# Altium PCB PCB2_DATCHIKI.PcbDoc
Units mm, origin at the board's own origin, x right, y up, seen from the top; angles counter-clockwise.
Board outline 20 x 20 mm, 2 copper layers (Top Layer, Bottom Layer), stack 1.57 mm thick; 16 components, 36 nets, 53 pads, 14 vias.
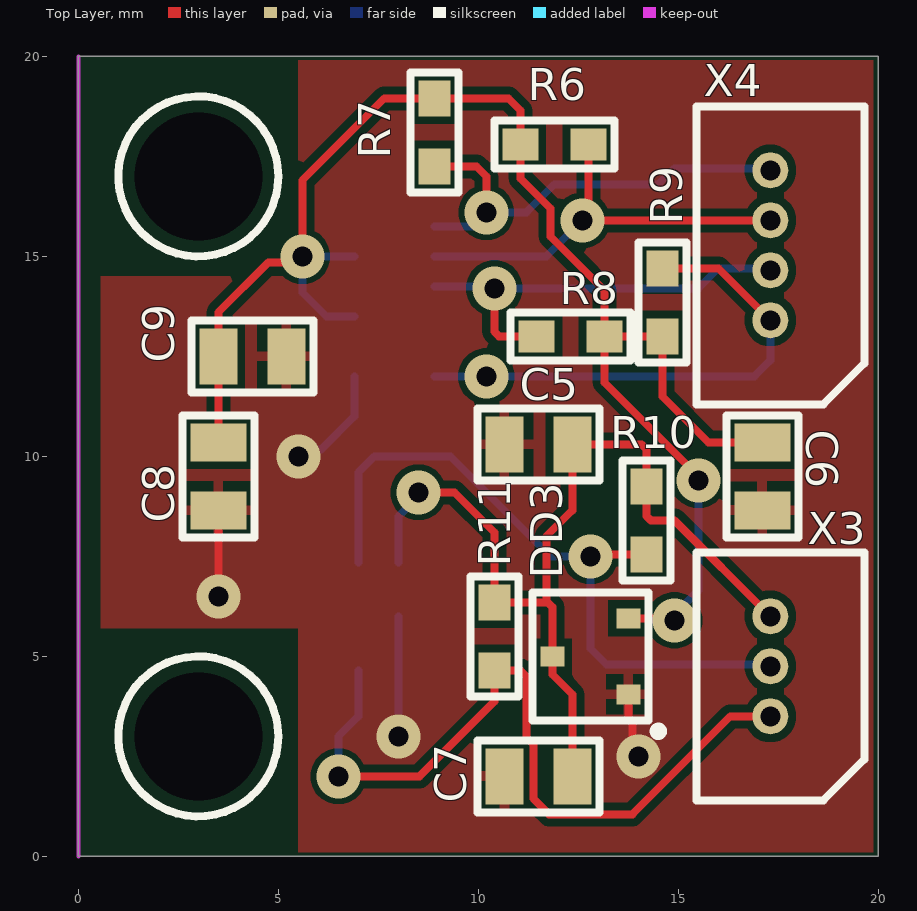
[diagram p0: Top Layer view]
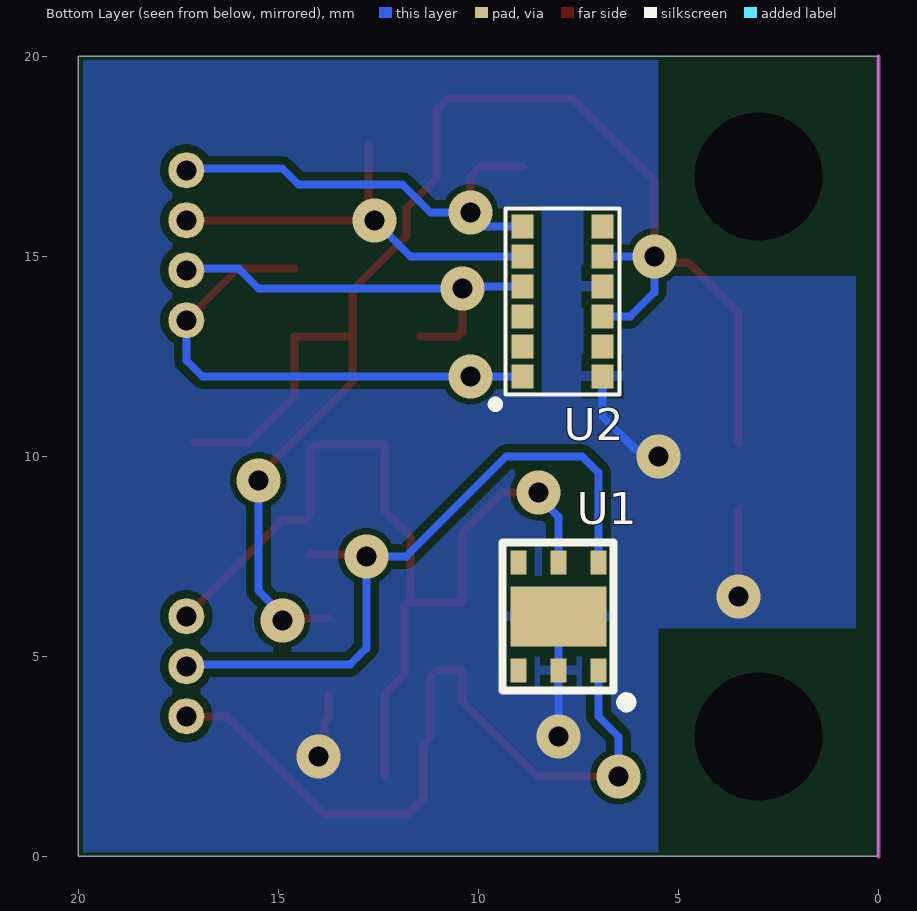
[diagram p1: Bottom Layer view, seen from below]
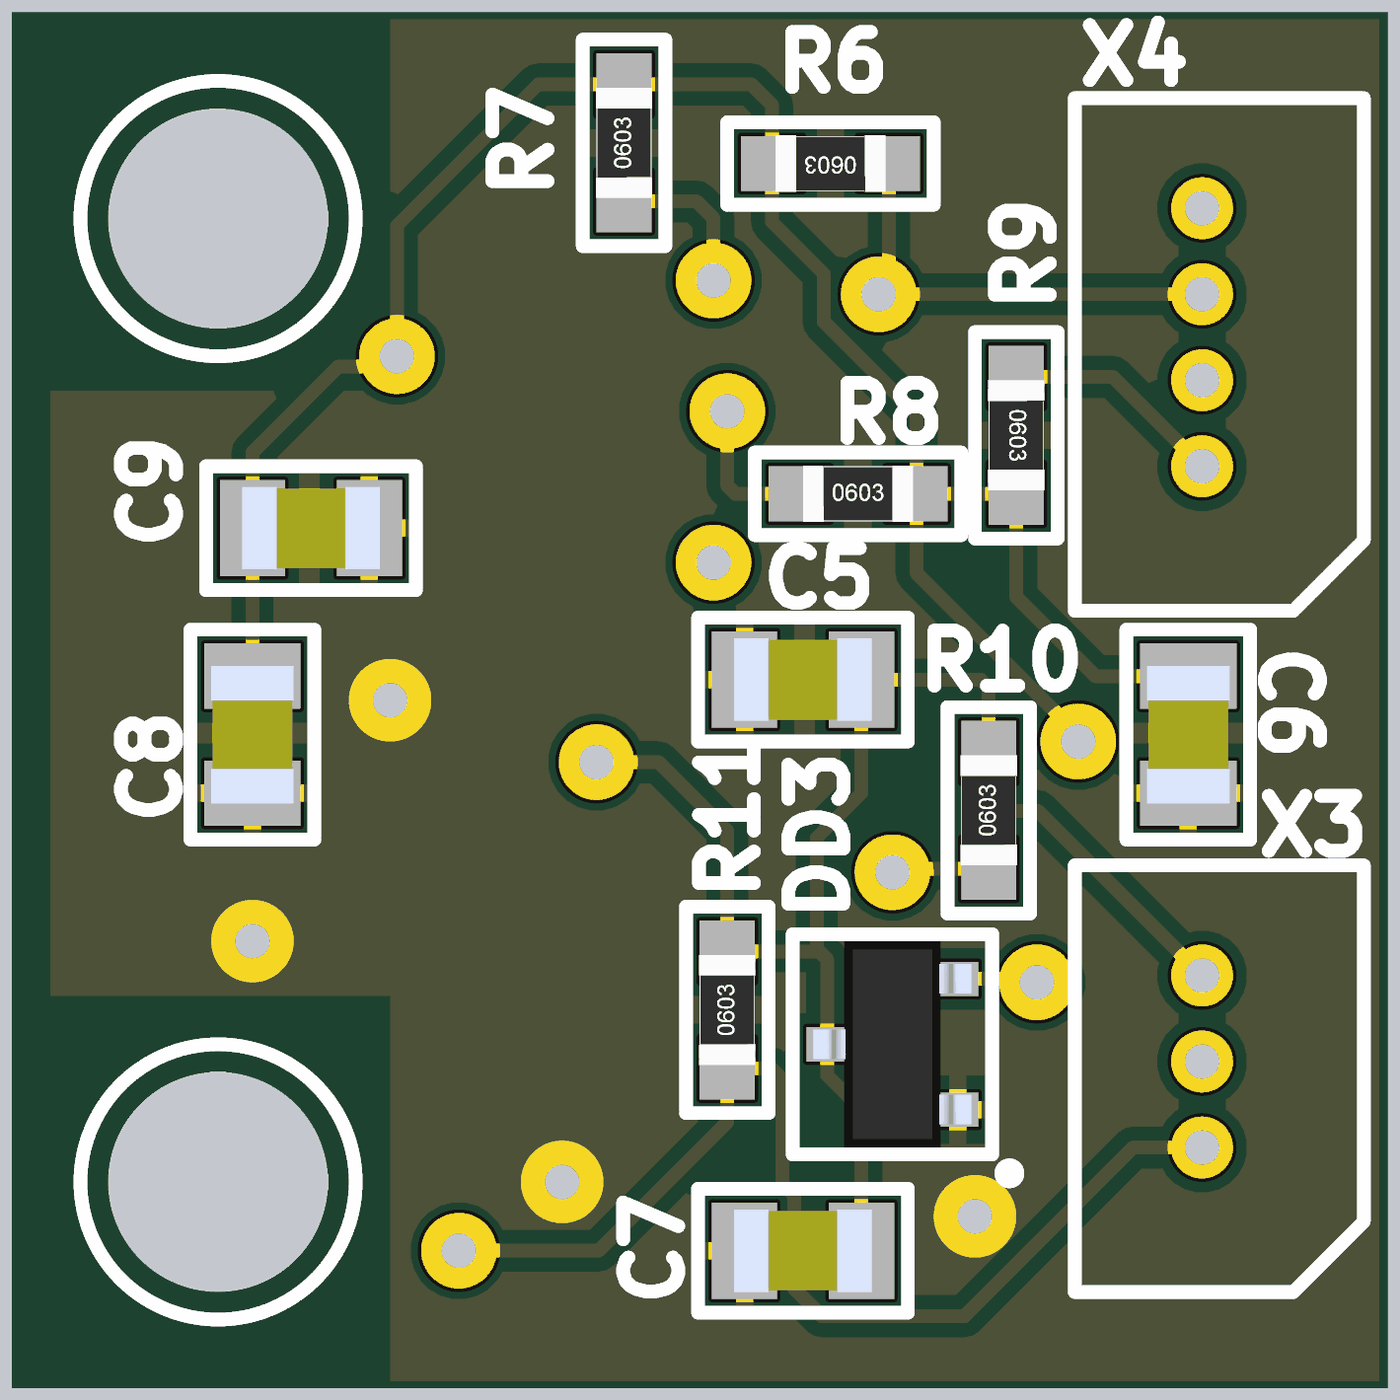
[diagram p2: 3D render of the assembled board from above, using the file's embedded part models]

## Layer stack, top to bottom
Top Solder: solder mask 0.01, Solder Resist, Dk 3.5
Top Layer: signal copper 0.035
Dielectric 1: dielectric 1.5, FR-4, Dk 4.6
Bottom Layer: signal copper 0.035
Bottom Solder: solder mask 0.01, Solder Resist, Dk 3.5

## Board outline
0,0 0,20 20,20 20,0

## Design rules (kind name [scope] priority, off if disabled: settings)
AcuteAngle [All] p1: minimum=6.00000000000000E+0001 checktracksonly=FALSE
Clearance Clearance_KeepOutLayer [OnLayer('Keep-Out Layer')] p1: gap=0.5 ignorepadtopadclearanceinfootprint=FALSE
Clearance [All] p2: gap=0.15 ignorepadtopadclearanceinfootprint=FALSE except(0.2: Track-Fill Track-Poly Track-Region SMDPad-Fill SMDPad-Poly SMDPad-Region THPad-Fill THPad-Poly THPad-Region Fill-Fill Fill-Poly Fill-Region Poly-Poly Poly-Region Region-Region)
ComponentClearance [All] p1: gap=0.2 collisioncheckmode=3 verticalgap=0.2 showdistances=FALSE
HoleSize [All] p1: absolutevalues=TRUE maxlimit=3.2 minlimit=0.3 maxpercent=80.000 minpercent=20.000
HoleToHoleClearance [All] p1: gap=0.2 allowstackedmicrovias=TRUE
MinimumAnnularRing [All] p1: minimumring=0.2
MinimumSolderMaskSliver [All] p1: minsoldermaskwidth=0.15
PolygonConnect PolygonConnect_Via [IsVia] p1: connectstyle=Direct reliefconductorwidth=0.254 reliefentries=4 polygonreliefangle="90 Angle" airgapwidth=0.254
PolygonConnect [All] p2: connectstyle=Relief reliefconductorwidth=0.25 reliefentries=4 polygonreliefangle="90 Angle" airgapwidth=0.25
RoutingVias [All] p1: holewidth=0.4 width=0.9 viastyle="Through Hole" minholewidth=0.3 minwidth=0.7 maxholewidth=0.5 maxwidth=1.1
SMDEntry [All] p1: side=TRUE corner=TRUE anyangle=FALSE
SMDNeckDown [All] p1: percent=100.000
SMDToCorner [All] p1: distance=0
SMDToPlane [All] p1: distance=0
SilkToSilkClearance [All] p1: silktosilkclearance=0
SilkToSolderMaskClearance [IsPad] p1: minsilkscreentomaskgap=0 clearancetoexposedcopper=FALSE
SolderMaskExpansion [All] p1: expansion=0.05 istentingtop=FALSE
Width [All] p1: maxlimit=5 minlimit=0.15 preferedwidth=0.25
24 further rules are at their usual default settings.

## Classes and differential pairs
component class Sheet3_mk: C7 C8 C9 DD3
component class Sheet2_datciki: C5 C7 C8 C9 DD3 R6 R7 R9 R10 U1 X3 X4

## Components (designator, comment, footprint, x,y, rotation, side; value= is the part's Value field where it differs from the comment)
C5 "1 мкФ" CAP_0805 11.5,10.3 r180 top
C6 "1 мкФ" CAP_0805 17.1,9.5 r270 top
C7 "100 нФ" CAP_0805 11.5,2 r0 top
C8 "4.7 мкФ" CAP_0805 3.5,9.5 r270 top
C9 "100 нФ" CAP_0805 4.35,12.5 r0 top
DD3 "XC6206P282MR" SOT-23-3_STAB_POWER 12.8,5 r90 top
R6 "47 кОм" RES_0603 11.9,17.8 r180 top
R7 "47 кОм" RES_0603 8.9,18.1 r90 top
R8 "47 кОм" RES_0603 12.3,13 r0 top
R9 "47 кОм" RES_0603 14.6,13.85 r270 top
R10 "10 кОм" RES_0603 14.2,8.4 r90 top
R11 "10 кОм" RES_0603 10.4,5.5 r90 top
U1 "HPP845E034R5" HTU20D(F) 9,4.65 r90 bottom
U2 "VL6180XV0NR/1" SOP12 6.9,15.75 r270 bottom
X3 "SCT1251WV-3P" Raziem3(1) 17.3,4.75 r90 top
X4 "SCT1251WV-4P" Raziem4(1) 17.3,14.65 r90 top

## Footprints (in the part's own frame and the unit in brackets; to place one, negate y for a bottom-side part, rotate by r counter-clockwise, add the part's x,y. Pads: shape width x height; smd on the part's side, far side on the other; paste and mask are expansions set on the pad)
CAP_0805 [mm]
  rect 0.95x1.4 smd: 1(-0.85,0) 2(0.85,0)
  silkscreen extent -1.53,-0.9 1.53,0.9, body extent -1,-0.6 1,0.6, height 0.9
HTU20D(F) [mm]
  rect 0.6x0.4 smd: 1(0,-2) 2(0,-1) 3(0,0) 4(2.7,0) 5(2.7,-1) 6(2.7,-2)
  rect 1.5x2.4 smd: 2(1.35,-1)
  silkscreen extent -0.92,-2.82 3.2,0.4, body extent -0.25,-2.17 2.95,0.15, height 0.7
Raziem3(1) [mm]
  round 0.9 hole 0.5: 1(-1.25,0) 2(0,0) 3(1.25,0)
  silkscreen extent -3.35,-2.35 2.85,1.85, body extent -2.75,-1.75 2.75,1.75, height 4.7
Raziem4(1) [mm]
  round 0.9 hole 0.5: 1(-1.25,0) 2(0,0) 3(1.25,0) 4(2.5,0)
  silkscreen extent -3.35,-2.35 4.1,1.85, body extent -2.75,-1.75 4,1.75, height 4.7
RES_0603 [mm]
  rect 0.9x0.8 smd: 1(-0.85,0) 2(0.85,0)
  silkscreen extent -1.5,-0.6 1.5,0.6, body extent -0.8,-0.41 0.8,0.41, height 0.45
SOP12 [mm]
  rect 0.6x0.55 smd: 1(3.75,-2) 2(3,-2) 3(2.25,-2) 4(1.5,-2) 5(0.75,-2) 6(0,-2) 7(0,0) 8(0.75,0) 9(1.5,0) 10(2.25,0) 11(3,0) 12(3.75,0)
  silkscreen extent -0.45,-2.77 4.54,0.43, body extent -0.4,-2.37 4.15,0.38, height 1.2
SOT-23-3_STAB_POWER [mm]
  rect 0.5x0.6 smd: 1(-0.95,-0.95) 2(0,0.95) 3(0.95,-0.95)
  silkscreen extent -1.97,-1.79 1.6,1.45, body extent -1.5,-1.15 1.5,1.15, height 1.1

## Part data
C5 C6 C7 C8 C9: library part Condensator
DD3: library part Stability_power, Name=XC6206P282MR
R6 R7 R8 R9 R10 R11: library part Rezistor
U1: library part Datchik_vlaj_temp, Name=HPP845E034R5
U2: library part Datchik_osvet, Name=VL6180XV0NR/1
X3: library part Raziem_3KONTKTA, Name=SCT1251WV-3P
X4: library part Raziem_4KONTKTA, Name=SCT1251WV-4P

## Free pads (board coordinates)
  round 0 hole 3.2 unplated: 1(3,17) 1(3,3)

## Via types
v1: diameter 1.1, hole 0.5, Top Layer to Bottom Layer, 14 vias

## Nets (pads, with @x,y where several pads share a name; then routed paths per layer and width w, separated by ;. In a path a pad name is that pad's centre, name@x,y a point inside that pad or via, vN(x,y) a via of type N, cw(c..) or ccw(c..) an arc to the next point about the centre after c; other vN are vias at no path point)
GND: C5.2 C6.2 C7.1 C8.2 C9.2 DD3.1 U1.2 U2.9 U2.12 | length 9.6
  Top Layer w0.2: v1(3.5,6.5) C8.2 ; DD3.1 13.75,3.45 13.85,3.35 13.85,2.65 v1(14,2.5)
  Bottom Layer w0.2: v1(5.5,10) 5.672,10.172 6.072,10.172 6.9,11 U2.12 ; v1(8,3) 8,4.65 U1.2@8,6
NetC1_1: 
NetC2_1: 
NetC3_2: 
NetC4_1: C5.1 C7.2 DD3.2 R10.2 R11.2 U1.5 X3.3 | length 23.8
  Top Layer w0.2: v1(8.5,9.1) 9.4,9.1 10.4,8.1 R11.2 ; R11.2@10.5,6.35 11.7,6.35 ; C7.2 12.35,4.05 11.85,4.55 11.85,6.233 11.733,6.35 11.7,6.35 ; X3.3 14.907,8.393 14.317,8.393 14.2,8.51 R10.2 14.2,10.183 14.083,10.3 C5.1 12.35,8.65 11.7,8 11.7,6.35
  Bottom Layer w0.2: U1.5 8,8.498 8.6,9.098 v1@8.6,9.1
NetC6_1: C6.1 C8.1 C9.1 DD3.3 R6.2 R7.2 R8.2 R9.2 U2.8 U2.10 | length 39.9
  Top Layer w0.2: C8.1 C9.1 3.5,13.6 4.749,14.849 5.449,14.849 v1(5.6,15) 5.6,16.9 7.65,18.95 R7.2 10.75,18.95 11.05,18.65 R6.2 11.05,16.95 11.8,16.2 11.8,15.5 13.15,14.15 R8.2 ; DD3.3 14.85,5.95 v1(14.9,5.9) ; v1(15.5,9.4) 15.5,9.5 13.15,11.85 R8.2 ; C6.1 15.75,10.35 14.6,11.5 R9.2 13.6,13 R8.2
  Bottom Layer w0.2: U2.10 6.2,13.5 5.6,14.1 v1(5.6,15) U2.8 ; v1(14.9,5.9) 14.9,6.044 15.5,6.644 v1(15.5,9.4)
NetC10_2: 
NetC11_2: 
NetC14_2: 
NetC16_1: 
NetC17_1: 
NetC18_1: 
NetC19_1: 
NetC20_1: 
NetC21_1: 
NetDD2_1: 
NetDD2_2: 
NetDD2_5: 
NetDD4_4: R11.1 U1.1 X3.1 | length 19.3
  Top Layer w0.2: v1(6.5,2) 8.527,2 10.4,3.873 R11.1 ; R11.1@10.5,4.65 11.05,4.65 11.2,4.5 11.2,2.979 11.375,2.804 11.375,1.446 11.771,1.05 13.85,1.05 16.3,3.5 X3.1
  Bottom Layer w0.2: v1(6.5,2) 6.5,3 7,3.5 U1.1
NetDD4_5: R10.1 U1.6 X3.2 | length 17.7
  Top Layer w0.2: v1(12.8,7.5) 12.9,7.5 12.95,7.55 R10.1
  Bottom Layer w0.2: U1.6 7,7.65 7,9.594 7.406,10 9.3,10 11.8,7.5 v1(12.8,7.5) 12.8,5.2 13.2,4.8 17.25,4.8 X3.2
NetDD4_6: R9.1 U2.1 X4.1 | length 12.8
  Top Layer w0.2: R9.1 16,14.7 X4.1
  Bottom Layer w0.2: U2.1 v1(10.2,12) 16.9,12 17.3,12.4 X4.1
NetDD4_7: R8.1 U2.4 X4.2 | length 10.8
  Top Layer w0.2: v1(10.4,14.2) 10.4,13.117 10.517,13 R8.1
  Bottom Layer w0.2: U2.4 10.35,14.25 v1(10.4,14.2) 15.5,14.2 16,14.7 17.25,14.7 X4.2
NetDD4_8: R6.1 U2.5 X4.3 | length 10.7
  Top Layer w0.2: R6.1 12.75,16.05 v1(12.6,15.9) X4.3
  Bottom Layer w0.2: U2.5 11.7,15 v1(12.6,15.9)
NetDD4_9: R7.1 U2.6 X4.4 | length 11.3
  Top Layer w0.2: R7.1 9.95,17.25 10.2,17 v1(10.2,16.1)
  Bottom Layer w0.2: U2.6 9.85,15.75 v1(10.2,16.1) 11.2,16.1 11.9,16.8 14.5,16.8 14.9,17.2 17.25,17.2 X4.4
NetDD4_10: 
NetDD4_21: 
NetDD4_24: 
NetDD4_25: 
NetDD4_26: 
NetDD4_47: 
NetHL1_K: 
NetL1_2: 
NetL3_2: 
NetR2_1: 
NetR3_2: 
NetSB1_1: 
pads on no net: U1.3 U1.4 U2.2 U2.3 U2.7 U2.11

## Polygon pours and split planes (outlines as drawn)
GND on Top Layer "Top Layer-GND" (solid, remove dead copper, pour order 0): 0.075,19.9 19.875,19.9 19.875,0.1 0.075,0.1
GND on Bottom Layer "Bottom Layer-GND" (solid, remove dead copper, pour order 1): 0.075,19.9 19.875,19.9 19.875,0.1 0.075,0.1

## Keep-outs
Keep-Out Layer:
  lines w0.1: 0,0 0,20

## Other copper
Top Layer:
  pour cut-out: 5.5,19.925 0.3,19.925 0.3,14.5 5.5,14.5
  pour cut-out: 5.5,5.7 0.3,5.7 0.3,0.075 5.5,0.075
Bottom Layer:
  pour cut-out: 5.5,5.7 0.3,5.7 0.3,0.075 5.5,0.075
  pour cut-out: 5.5,19.925 0.3,19.925 0.3,14.5 5.5,14.5

## Silkscreen, mask and mechanical layers (free items; w line width, h text height)
Top Overlay:
  circle w0.2: c3,3 r2
  circle w0.2: c3,17 r2